# Altium PCB 夏友.PcbDoc (part 2 of 6)
Units mm, origin at the board's own origin, x right, y up, seen from the top; angles counter-clockwise.
Board outline 130.55 x 65.02 mm, 2 copper layers (Top Layer, Bottom Layer); 162 components, 175 nets, 628 pads, 694 vias.
Unrouted connection lines stored in the file: 1.
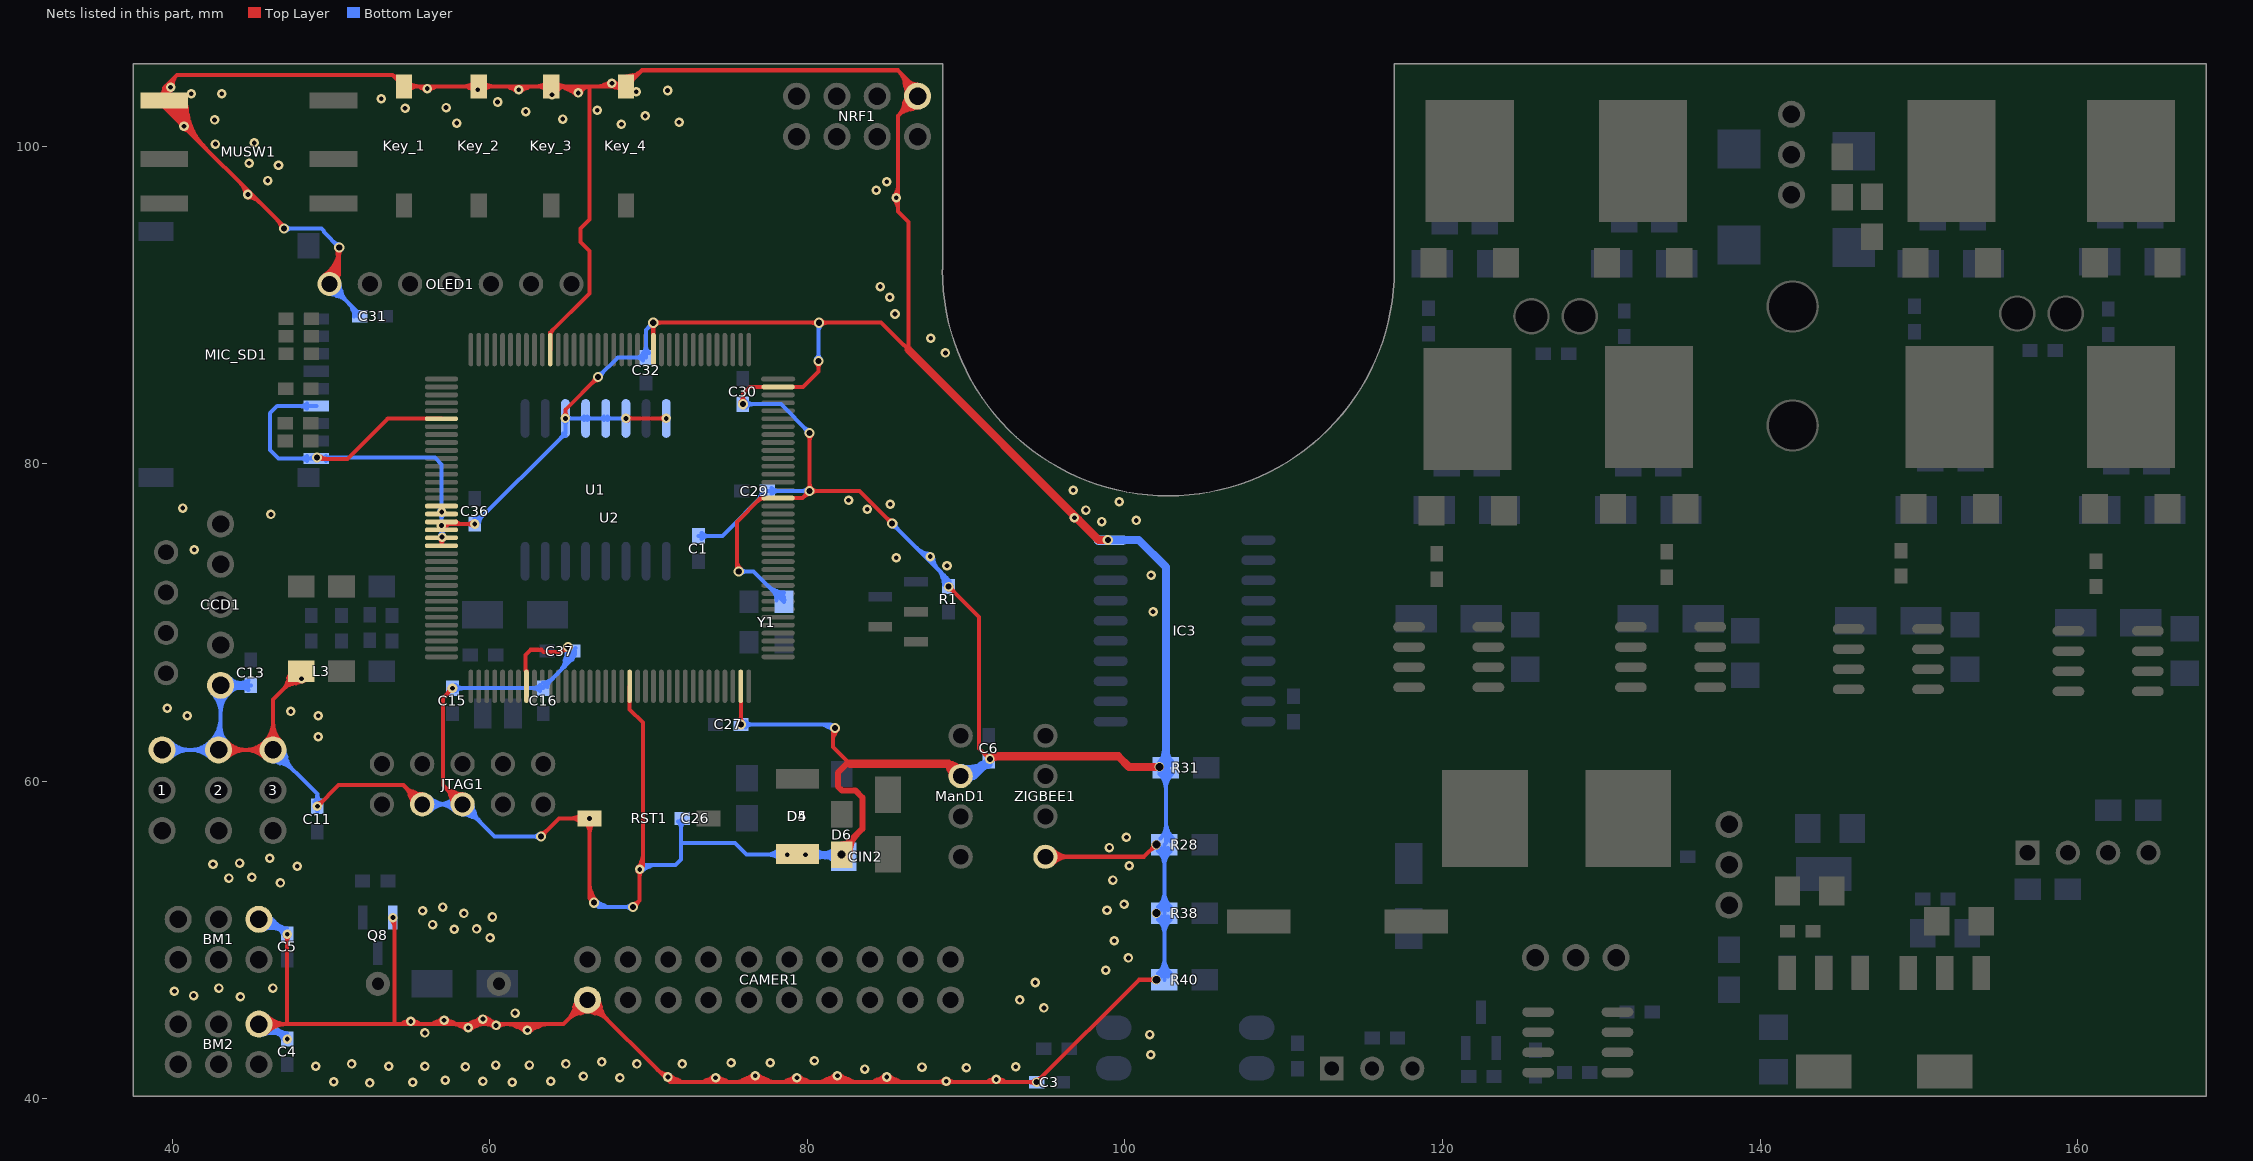
[diagram p2: the nets of this part, all layers, seen from the top]

## Via types
v1: diameter 0.6, hole 0.3, Top Layer to Bottom Layer, 442 vias
v2: diameter 0.635, hole 0.381, Top Layer to Bottom Layer, 150 vias
v3: diameter 0.6, hole 0.381, Top Layer to Bottom Layer, 48 vias
v4: diameter 0.7, hole 0.6, Top Layer to Bottom Layer, 16 vias
v5: diameter 0.6, hole 0.5, Top Layer to Bottom Layer, 10 vias
v6: diameter 0.6, hole 0.4, Top Layer to Bottom Layer, 7 vias
v7: diameter 0.7, hole 0.5, Top Layer to Bottom Layer, 5 vias
v8: diameter 0.6, hole 0.33, Top Layer to Bottom Layer, 5 vias
v9: diameter 0.7, hole 0.4, Top Layer to Bottom Layer, 3 vias
v10: diameter 1, hole 1, Top Layer to Bottom Layer, 2 vias
v11: diameter 3, hole 3, Top Layer to Bottom Layer, 2 vias
v12: diameter 1.016, hole 0.762, Top Layer to Bottom Layer, 2 vias
v13: diameter 0.7, hole 0.381, Top Layer to Bottom Layer, 1 vias
v14: diameter 0.635, hole 0.508, Top Layer to Bottom Layer, 1 vias

## Nets (pads, with @x,y where several pads share a name; then routed paths per layer and width w, separated by ;. In a path a pad name is that pad's centre, name@x,y a point inside that pad or via, vN(x,y) a via of type N, cw(c..) or ccw(c..) an arc to the next point about the centre after c; other vN are vias at no path point) (continued)
DGND: 1.1 2.1 3.1 BM1.1 BM2.1 C1.2 C3.1 C4.2 C5.2 C6.2 C11.1 C13.1 C15.2 C16.2 C26.1 C27.1 C29.1 C30.2 C31.2 C32.2 C36.1 C37.2 CAMER1.20 CCD1.5 CIN2.2 D4.1 D5.1 D6.2 IC3.10 JTAG1.3 JTAG1.5 Key_1.2 Key_2.2 Key_3.2 Key_4.2 L3.1 ManD1.2 MIC_SD1.6 MIC_SD1.9 MUSW1.4 NRF1.8 OLED1.1 Q8.3 R1.1 R28.1 R31.1 R38.1 R40.1 RST1.2 U1.3 U1.4 U1.5 U1.6 U1.8 U2.6 U2.17 U2.18 U2.19 U2.20 U2.21 U2.22 U2.44 U2.57 U2.71 U2.93 U2.107 U2.121 U2.134 Y1.1 ZIGBEE1.4 | length 1434.2
  Top Layer w0.254: MUSW1.4@39.403,103.231 ccw(c39.351,103.429) 39.548,103.376 ccw(c39.675,103.342) MUSW1.4@39.629,103.219 ; 39.617,103.557 cw(c39.709,103.451) v1@39.795,103.563 ; MUSW1.4@39.625,103.239 ccw(c39.376,103.525) v1@39.736,103.645 ; 39.764,102.258 cw(c40.306,102.403) MUSW1.4@39.82,102.684 ; MUSW1.4@40.283,102.565 cw(c39.535,101.5) 40.816,101.724 ; MUSW1.4@40.294,102.557 cw(c40.048,102.181) 40.488,102.274 ; MUSW1.4@40.426,102.774 cw(c39.506,101.531) 41.036,101.759 ; MUSW1.4@40.429,102.773 cw(c40.033,102.21) 40.711,102.328 ; 40.562,101.926 cw(c41.295,102.081) MUSW1.4@40.762,102.608 ; MUSW1.4@40.577,102.978 cw(c40.022,102.228) 40.945,102.366 ; 40.719,102.282 cw(c41.212,102.368) MUSW1.4@40.802,102.656 ; v1@40.918,101.293 ccw(c41.741,101.502) 41.347,100.749 ; 2.1@42.926,61.976 3.1@46.355,61.976 46.355,65.146 L3.1@48.138,66.929 ; BM2.1@45.466,44.704 47.225,44.704 ; v2@47.107,94.86 39.497,102.47 MUSW1.4@39.497,102.87 39.497,103.672 ; 47.195,66.051 cw(c48.341,65.743) L3.1@48.002,66.881 ; v1(47.244,50.368) 47.244,44.723 47.225,44.704 ; L3.1@47.312,66.49 cw(c48.189,66.255) L3.1@47.93,67.125 ; 47.4,66.076 ccw(c47.144,67.031) L3.1@48,66.536 ; 47.425,66.083 ccw(c47.151,67.106) L3.1@48.188,66.887 ; 47.502,66.138 cw(c47.983,65.461) L3.1@48.121,66.279 ; L3.1@47.659,66.283 ccw(c47.472,66.981) L3.1@48.191,66.909 ; L3.1@47.706,66.314 cw(c47.874,66.057) L3.1@48.051,66.308 ; L3.1@47.786,66.433 cw(c47.839,66.236) L3.1@48.008,66.352 ; 47.792,66.171 ccw(c47.608,66.493) L3.1@47.978,66.464 ; 47.825,66.19 ccw(c47.605,67.01) L3.1@48.436,66.834 ; L3.1@48.115,66.619 ccw(c48.014,67.113) L3.1@48.456,66.871 ; L3.1@48.225,66.297 ccw(c48.06,66.914) L3.1@48.685,66.781 ; v2(49.127,80.379) 49.206,80.3 51.05,80.3 53.581,82.831 U2.6@56.964,82.831 ; v1(49.149,58.42) 50.479,59.75 54.575,59.75 55.753,58.572 JTAG1.3@55.753,58.547 ; OLED1.1@49.911,91.313 50.525,91.927 ; OLED1.1@50.096,91.921 ccw(c50.168,92.159) 50.354,91.993 ccw(c50.479,91.881) OLED1.1@50.36,91.762 ; v1(53.909,51.417) 54,51.326 54,44.704 ; 54.537,44.786 cw(c54.696,44.512) v1@54.909,44.747 ; 54.954,59.16 ccw(c55.946,59.426) JTAG1.3@55.726,58.423 ; v1@55.141,44.747 cw(c55.354,44.512) 55.513,44.786 ; 55.163,59.34 cw(c54.908,58.386) JTAG1.3@55.878,58.571 ; 55.644,103.681 ccw(c55.761,103.883) v1@55.941,103.735 ; v1@56.209,103.735 ccw(c56.389,103.883) 56.506,103.681 ; 56.523,44.795 cw(c56.785,44.34) v1@57.041,44.799 ; 56.854,44.703 ccw(c56.751,44.883) v1@56.955,44.919 ; U2.22@56.964,74.831 U2.21@56.964,75.331 ; U2.19@57.039,76.2 v1(59.055,76.2) ; U2.19@57.114,76.187 ccw(c57.259,76.272) 57.343,76.126 ; v1@57.209,44.799 cw(c57.465,44.34) 57.727,44.795 ; v1@57.295,44.919 ccw(c57.499,44.883) 57.396,44.703 ; 57.499,59.141 ccw(c58.46,59.399) JTAG1.5@58.269,58.422 ; v1(57.658,65.862) 57.05,65.254 57.05,59.775 58.278,58.547 JTAG1.5@58.293,58.547 ; 57.684,59.345 cw(c57.421,58.361) JTAG1.5@58.417,58.574 ; 58.074,44.615 ccw(c58.31,45.025) v1@58.559,44.622 ; v1@58.579,44.514 cw(c59.247,44.147) 59.049,44.883 ; 58.704,103.672 ccw(c58.912,104.032) Key_2.2@59.151,103.692 ; v1@58.741,44.622 ccw(c58.99,45.025) 59.226,44.615 ; 58.858,44.804 cw(c59.25,44.125) v1@59.516,44.862 ; 59.19,44.712 ccw(c58.974,45.085) v1@59.403,45.042 ; Key_2.2@59.349,103.692 ccw(c59.588,104.032) Key_2.2@59.796,103.672 ; v1@59.543,45.1 cw(c59.665,44.814) 59.883,45.035 ; v1@59.634,44.862 cw(c59.9,44.125) v1@60.292,44.804 ; v1@59.643,44.866 cw(c59.825,44.437) v1@60.153,44.768 ; v1@59.747,45.042 ccw(c60.176,45.085) 59.96,44.712 ; 59.982,45.009 ccw(c60.352,45.225) v1@60.386,44.797 ; 60.034,44.836 cw(c59.823,44.467) v1@60.233,44.579 ; 60.043,44.831 ccw(c60.246,45.188) v1@60.354,44.792 ; 61.279,103.672 ccw(c61.487,104.032) v1@61.726,103.692 ; 61.58,44.591 ccw(c62.074,45.447) v1@62.33,44.492 ; 61.901,44.689 cw(c61.575,44.125) v1@62.207,44.283 ; v1@61.924,103.692 ccw(c62.163,104.032) 62.371,103.672 ; U2.44@62.314,65.981 62.314,66.988 62.241,67.061 ; v1@62.42,44.492 ccw(c62.676,45.447) 63.17,44.591 ; v1@62.543,44.283 cw(c63.175,44.125) 62.849,44.689 ; v2(63.225,56.525) 64.358,57.658 v1(66.294,57.658) 66.294,52.631 ; v2@63.23,56.715 ccw(c63.241,57.138) 63.543,56.843 ; v2@63.415,56.527 cw(c63.863,56.53) 63.55,56.85 ; v2@63.415,56.53 cw(c63.838,56.541) 63.543,56.843 ; U2.134@63.814,87.181 63.814,88.264 66.275,90.725 66.275,93.406 65.728,93.953 65.728,94.797 66.3,95.369 66.3,103.759 ; Key_3.2@63.932,103.398 ccw(c63.95,103.861) Key_3.2@64.351,103.629 ; 64.646,68.249 ccw(c64.617,68.723) v2@64.973,68.408 ; v1(64.77,82.85) 64.77,83.395 v2(66.825,85.45) ; 64.78,103.616 ccw(c65.274,104.472) v1@65.53,103.517 ; v2(64.925,68.45) 64.8,68.45 64.496,68.146 ; 65.089,103.721 cw(c64.746,103.128) v1@65.408,103.305 ; 65.216,45.378 cw(c66.406,45.059) CAMER1.20@66.159,46.266 ; 65.317,45.277 ccw(c64.998,46.467) CAMER1.20@66.205,46.22 ; 65.323,45.775 cw(c66.314,45.509) CAMER1.20@66.108,46.515 ; v1@65.608,103.52 ccw(c65.665,103.818) 65.934,103.678 ; 65.714,45.384 ccw(c65.448,46.375) CAMER1.20@66.454,46.169 ; CAMER1.20@65.88,46.169 ccw(c66.886,46.375) 66.62,45.384 ; CAMER1.20@66.129,46.22 ccw(c67.336,46.467) 67.017,45.277 ; CAMER1.20@66.175,46.266 cw(c65.928,45.059) 67.118,45.378 ; CAMER1.20@66.226,46.515 cw(c66.02,45.509) 67.011,45.775 ; 66.304,52.697 ccw(c66.575,52.854) v2@66.575,52.54 ; 66.366,52.589 cw(c66.149,52.464) v2@66.391,52.399 ; 66.395,53.029 cw(c65.867,52.724) v2@66.407,52.439 ; v2(66.575,52.35) 66.294,52.631 ; v2@66.635,85.445 cw(c66.212,85.434) 66.507,85.132 cw(c66.809,84.837) v2@66.82,85.26 ; v2@66.823,85.26 ccw(c66.82,84.812) 66.5,85.125 ; 67.182,103.844 cw(c67.365,103.525) v1@67.593,103.814 ; v1@67.807,103.814 cw(c68.035,103.525) Key_4.2@68.218,103.844 ; Key_4.2@68.468,104.073 cw(c69.176,103.695) Key_4.2@69.01,104.48 ; v1(68.58,82.85) v1(71.12,82.85) ; U2.57@68.814,65.981 68.814,64.53 69.65,63.694 69.65,54.653 v1(69.447,54.45) 69.447,52.497 v2(69.025,52.075) ; v2@69.03,52.265 ccw(c69.041,52.688) 69.343,52.393 ; v2@69.215,52.077 cw(c69.663,52.08) 69.35,52.4 cw(c69.03,52.713) v2@69.027,52.265 ; v2@69.215,52.08 cw(c69.638,52.091) 69.343,52.393 ; 69.564,54.987 ccw(c69.91,54.787) v1@69.587,54.552 ; U2.121@70.314,87.181 70.3,87.195 v2(70.3,88.875) v2(80.75,88.875) 84.65,88.875 86.062,87.462 86.087,87.462 86.362,87.187 86.362,93.271 86.379,93.288 86.379,94.762 86.362,94.779 86.362,95.213 85.7,95.875 85.7,101.895 NRF1.8@86.945,103.14 86.945,103.53 85.7,104.775 ; v1@71.283,41.212 cw(c71.549,40.458) 71.948,41.15 ; v1@71.397,41.394 ccw(c71.839,41.444) 71.617,41.059 ; 73.578,41.144 cw(c73.888,40.608) v1@74.151,41.168 ; 73.91,41.053 ccw(c73.767,41.3) v1@74.052,41.316 ; v1@74.299,41.168 cw(c74.562,40.608) 74.872,41.144 ; v1@74.398,41.316 ccw(c74.683,41.3) 74.54,41.053 ; v2(75.685,73.215) 75.578,73.322 75.578,76.34 77.069,77.831 U2.93@78.164,77.831 79.706,77.831 v2(80.15,78.275) ; U2.71@75.814,65.981 75.814,63.586 v2(75.825,63.575) ; 75.93,41.184 cw(c76.424,40.328) v1@76.68,41.283 ; v2(75.946,83.744) 75.946,84.396 76.381,84.831 U2.107@78.164,84.831 79.731,84.831 80.7,85.8 v2(80.7,86.475) ; 76.239,41.079 ccw(c75.896,41.672) v1@76.558,41.495 ; v1@76.77,41.283 cw(c77.026,40.328) 77.52,41.184 ; v1@76.892,41.495 ccw(c77.554,41.672) 77.211,41.079 ; 78.703,41.144 cw(c79.013,40.608) v1@79.276,41.168 ; 79.035,41.053 ccw(c78.892,41.3) v1@79.177,41.316 ; v1@79.424,41.168 cw(c79.687,40.608) 79.997,41.144 ; v1@79.523,41.316 ccw(c79.808,41.3) 79.665,41.053 ; v2@79.96,78.27 cw(c79.537,78.259) 79.832,77.957 cw(c80.134,77.662) v2@80.145,78.085 ; v2@79.96,78.273 cw(c79.512,78.27) 79.825,77.95 ; v2@80.148,78.085 ccw(c80.145,77.637) 79.825,77.95 ; v2(80.15,81.925) v2(80.15,78.275) ; 81.105,41.184 cw(c81.599,40.328) v1@81.855,41.283 ; 81.414,41.079 ccw(c81.071,41.672) v1@81.733,41.495 ; v2@81.642,63.199 cw(c81.507,63.014) 81.705,62.9 ; v2(81.754,63.353) 81.621,63.22 81.621,62.16 82.681,61.1 ; v1@81.945,41.283 cw(c82.201,40.328) 82.695,41.184 ; v1@82.067,41.495 ccw(c82.729,41.672) 82.386,41.079 ; 84.277,41.15 cw(c84.676,40.458) v1@84.942,41.212 ; 84.608,41.059 ccw(c84.386,41.444) v1@84.828,41.394 ; v1@85.058,41.212 cw(c85.324,40.458) 85.723,41.15 ; v2@85.16,76.23 ccw(c84.737,76.241) 85.032,76.543 ccw(c85.334,76.838) v2@85.345,76.415 ; v1@85.172,41.394 ccw(c85.614,41.444) 85.392,41.059 ; v2@85.348,76.415 cw(c85.345,76.863) 85.025,76.55 ; v2(85.35,76.225) 83.3,78.275 v2(80.15,78.275) ; 85.626,96.371 cw(c85.772,96.455) v1@85.687,96.6 ; 85.626,97.129 ccw(c85.772,97.045) v1@85.687,96.9 ; 85.994,102.29 cw(c87.184,101.971) NRF1.8@86.937,103.178 ; 86.095,102.189 ccw(c85.776,103.379) NRF1.8@86.983,103.132 ; 86.101,102.687 cw(c87.092,102.421) NRF1.8@86.886,103.427 ; 86.121,104.016 ccw(c87.783,104.242) NRF1.8@86.768,102.907 ; 86.377,103.953 ccw(c87.553,104.113) NRF1.8@86.924,103.107 ; 86.492,102.296 ccw(c86.226,103.287) NRF1.8@87.232,103.081 ; 86.626,103.948 cw(c86.413,103.151) NRF1.8@87.238,103.134 ; v3(88.9,72.263) 90.825,70.338 90.825,62.075 v3(91.5,61.4) ; 91.406,41.133 cw(c91.57,40.85) v1@91.786,41.095 ; v1@92.014,41.095 cw(c92.23,40.85) 92.394,41.133 ; ZIGBEE1.4@94.996,55.245 101.219,55.245 v5(101.981,56.007) ; v5(101.981,47.498) 100.898,47.498 v3(94.45,41.05) 71.345,41.05 CAMER1.20@66.167,46.228 64.643,44.704 47.225,44.704 ; 39.497,103.672 cw(c38.821,103.672) 39.257,103.155 ccw(c38.821,103.672) 39.497,103.672 ; 39.497,103.672 ccw(c40.173,103.672) 39.737,103.155 cw(c40.173,103.672) 39.497,103.672 ; 39.497,103.672 40.3,104.475 ; 40.3,104.475 ccw(c40.89,103.885) 40.07,103.732 cw(c40.89,103.885) 40.3,104.475 ; 40.3,104.475 53.894,104.475 ; 40.538,101.638 cw(c40.146,101.412) v1@40.583,101.295 ; 40.538,101.638 cw(c40.146,101.412) v1@40.583,101.295 ; 40.538,101.638 cw(c40.146,101.412) v1@40.583,101.295 ; 40.562,101.596 ccw(c40.894,101.787) v1@40.795,101.417 ; 40.562,101.596 ccw(c40.894,101.787) v1@40.795,101.417 ; 40.562,101.596 ccw(c40.894,101.787) v1@40.795,101.417 ; v1@40.591,101.318 ccw(c39.975,101.583) 40.598,101.831 ; v1@40.591,101.318 ccw(c39.975,101.583) 40.598,101.831 ; v1@40.591,101.318 ccw(c39.975,101.583) 40.598,101.831 ; v1@40.621,101.366 ccw(c40.149,101.791) 40.757,101.976 ; v1@40.621,101.366 ccw(c40.149,101.791) 40.757,101.976 ; v1@40.621,101.366 ccw(c40.149,101.791) 40.757,101.976 ; v1@40.712,101.081 cw(c40.458,99.948) 41.439,100.57 ; v1@40.712,101.081 cw(c40.458,99.948) 41.439,100.57 ; v1@40.712,101.081 cw(c40.458,99.948) 41.439,100.57 ; v1@40.731,101.078 cw(c40.662,100.464) 41.145,100.85 ; v1@40.731,101.078 cw(c40.662,100.464) 41.145,100.85 ; v1@40.731,101.078 cw(c40.662,100.464) 41.145,100.85 ; v1@40.768,101.329 cw(c40.648,100.794) 41.111,101.088 ; v1@40.768,101.329 cw(c40.648,100.794) 41.111,101.088 ; v1@40.768,101.329 cw(c40.648,100.794) 41.111,101.088 ; v1@40.81,101.196 ccw(c40.54,101.439) 40.888,101.545 ; v1@40.81,101.196 ccw(c40.54,101.439) 40.888,101.545 ; v1@40.81,101.196 ccw(c40.54,101.439) 40.888,101.545 ; 44.058,61.976 cw(c44.058,63.108) 43.258,62.308 ccw(c44.058,63.108) 44.058,61.976 ; 44.058,61.976 ccw(c44.058,60.844) 43.258,61.644 cw(c44.058,60.844) 44.058,61.976 ; 44.61,61.976 cw(c44.61,60.231) 45.844,61.465 ccw(c44.61,60.231) 44.61,61.976 ; 44.61,61.976 ccw(c44.61,63.721) 3.1@45.844,62.487 ; 44.61,61.976 ccw(c44.61,63.721) 3.1@45.844,62.487 ; 44.671,61.976 cw(c44.671,63.721) 43.437,62.487 ccw(c44.671,63.721) 44.671,61.976 ; 44.671,61.976 ccw(c44.671,60.231) 43.437,61.465 cw(c44.671,60.231) 44.671,61.976 ; 45.223,61.976 cw(c45.223,60.844) 46.023,61.644 ccw(c45.223,60.844) 45.223,61.976 ; 45.223,61.976 ccw(c45.223,63.108) 3.1@46.023,62.308 ; 45.223,61.976 ccw(c45.223,63.108) 3.1@46.023,62.308 ; 3.1@45.844,62.487 ccw(c44.61,63.721) 46.355,63.721 ; 3.1@45.844,62.487 ccw(c44.61,63.721) 46.355,63.721 ; 3.1@46.023,62.308 ccw(c45.223,63.108) 46.355,63.108 ; 3.1@46.023,62.308 ccw(c45.223,63.108) 46.355,63.108 ; 46.355,63.108 ccw(c47.487,63.108) 46.687,62.308 cw(c47.487,63.108) 46.355,63.108 ; 46.355,63.721 ccw(c48.1,63.721) 46.866,62.487 cw(c48.1,63.721) 46.355,63.721 ; 46.598,44.704 cw(c46.598,45.836) 45.798,45.036 ccw(c46.598,45.836) 46.598,44.704 ; 46.598,44.704 ccw(c46.598,43.572) 45.798,44.372 cw(c46.598,43.572) 46.598,44.704 ; 47.211,44.704 cw(c47.211,46.449) 45.977,45.215 ccw(c47.211,46.449) 47.211,44.704 ; 47.211,44.704 ccw(c47.211,42.959) 45.977,44.193 cw(c47.211,42.959) 47.211,44.704 ; 47.244,49.951 cw(c47.662,49.951) 47.366,50.246 ccw(c47.662,49.951) 47.244,49.951 ; 47.244,49.951 ccw(c46.826,49.951) 47.122,50.246 cw(c46.826,49.951) 47.244,49.951 ; L3.1@47.675,66.287 ccw(c47.537,66.804) L3.1@48,66.536 ; L3.1@47.675,66.287 ccw(c47.537,66.804) L3.1@48,66.536 ; L3.1@47.675,66.287 ccw(c47.537,66.804) L3.1@48,66.536 ; L3.1@47.836,66.33 cw(c47.913,66.04) L3.1@48.064,66.3 ; L3.1@47.836,66.33 cw(c47.913,66.04) L3.1@48.064,66.3 ; L3.1@47.836,66.33 cw(c47.913,66.04) L3.1@48.064,66.3 ; 49.444,58.715 cw(c49.149,59.011) 49.149,58.593 ccw(c49.149,59.011) 49.444,58.715 ; 49.444,58.715 ccw(c49.74,58.42) 49.322,58.42 cw(c49.74,58.42) 49.444,58.715 ; v2@50.361,93.529 cw(c49.963,93.297) 50.408,93.18 ; v2@50.361,93.529 cw(c49.963,93.297) 50.408,93.18 ; v2@50.361,93.529 cw(c49.963,93.297) 50.408,93.18 ; 50.408,93.18 cw(c50.853,93.064) v2@50.621,93.461 ; 50.408,93.18 cw(c50.853,93.064) v2@50.621,93.461 ; 50.408,93.18 cw(c50.853,93.064) v2@50.621,93.461 ; 50.525,91.927 cw(c50.33,92.122) 50.203,91.877 ccw(c50.33,92.122) 50.525,91.927 ; 50.525,91.927 ccw(c50.72,91.732) 50.475,91.605 cw(c50.72,91.732) 50.525,91.927 ; 50.525,91.927 v2(50.525,93.625) ; 50.525,93.165 cw(c50.985,93.165) 50.66,93.49 ccw(c50.985,93.165) 50.525,93.165 ; 50.525,93.165 ccw(c50.065,93.165) 50.39,93.49 cw(c50.065,93.165) 50.525,93.165 ; v2(50.525,93.625) cw(c48.396,93.625) 49.563,91.844 ccw(c48.396,93.625) v2(50.525,93.625) ; 53.894,104.475 ccw(c54.26,104.841) 54.462,104.364 cw(c54.26,104.841) 53.894,104.475 ; 53.894,104.475 Key_1.2@54.61,103.759 Key_2.2@59.309,103.759 Key_3.2@63.881,103.759 66.3,103.759 ; 55.53,103.759 cw(c55.53,104.679) 54.879,104.028 ccw(c55.53,104.679) 55.53,103.759 ; 55.53,103.759 ccw(c55.53,102.839) 54.879,103.49 cw(c55.53,102.839) 55.53,103.759 ; 57.363,65.567 cw(c57.658,65.272) 57.658,65.689 ccw(c57.658,65.272) 57.363,65.567 ; 57.363,65.567 ccw(c57.067,65.862) 57.485,65.862 cw(c57.067,65.862) 57.363,65.567 ; 58.389,103.759 cw(c58.389,102.839) 59.04,103.49 ccw(c58.389,102.839) 58.389,103.759 ; 58.389,103.759 ccw(c58.389,104.679) 59.04,104.028 cw(c58.389,104.679) 58.389,103.759 ; 58.637,76.2 cw(c58.637,75.782) 58.933,76.078 ccw(c58.637,75.782) 58.637,76.2 ; 58.637,76.2 ccw(c58.637,76.618) 58.933,76.322 cw(c58.637,76.618) 58.637,76.2 ; 58.706,103.682 ccw(c58.92,104.054) Key_2.2@59.155,103.695 ; 58.706,103.682 ccw(c58.92,104.054) Key_2.2@59.155,103.695 ; 58.706,103.682 ccw(c58.92,104.054) Key_2.2@59.155,103.695 ; v1@59.868,45.05 cw(c59.482,44.374) v1@60.233,44.579 ; v1@59.868,45.05 cw(c59.482,44.374) v1@60.233,44.579 ; v1@59.868,45.05 cw(c59.482,44.374) v1@60.233,44.579 ; 59.97,44.753 cw(c59.851,44.308) v1@60.25,44.539 ; 59.97,44.753 cw(c59.851,44.308) v1@60.25,44.539 ; 59.97,44.753 cw(c59.851,44.308) v1@60.25,44.539 ; 60.03,44.737 ccw(c60.126,45.099) v1@60.314,44.775 ; 60.03,44.737 ccw(c60.126,45.099) v1@60.314,44.775 ; 60.03,44.737 ccw(c60.126,45.099) v1@60.314,44.775 ; 60.229,103.759 cw(c60.229,104.679) 59.578,104.028 ccw(c60.229,104.679) 60.229,103.759 ; 60.229,103.759 ccw(c60.229,102.839) 59.578,103.49 cw(c60.229,102.839) 60.229,103.759 ; 62.241,67.061 cw(c62.108,66.928) 62.292,66.886 ccw(c62.108,66.928) 62.241,67.061 ; 62.241,67.061 ccw(c62.435,67.061) 62.327,66.9 cw(c62.435,67.061) 62.241,67.061 ; 62.241,67.061 62.241,67.962 62.559,68.281 63.25,68.281 63.385,68.146 64.496,68.146 ; 62.961,103.759 cw(c62.961,102.839) 63.612,103.49 ccw(c62.961,102.839) 62.961,103.759 ; 62.961,103.759 ccw(c62.961,104.679) 63.612,104.028 cw(c62.961,104.679) 62.961,103.759 ; v2@63.227,56.715 ccw(c63.232,57.157) 63.541,56.841 ; v2@63.227,56.715 ccw(c63.232,57.157) 63.541,56.841 ; v2@63.227,56.715 ccw(c63.23,57.163) 63.55,56.85 ; 63.541,56.841 ccw(c63.857,56.532) 63.415,56.527 cw(c63.857,56.532) 63.541,56.841 ; 63.55,56.85 cw(c63.225,57.175) 63.225,56.715 ccw(c63.225,57.175) 63.55,56.85 ; 63.55,56.85 ccw(c63.875,56.525) 63.415,56.525 cw(c63.875,56.525) 63.55,56.85 ; Key_3.2@64.092,103.18 cw(c64.88,102.969) 64.472,103.675 ; Key_3.2@64.092,103.18 cw(c64.88,102.969) 64.472,103.675 ; Key_3.2@64.092,103.18 cw(c64.88,102.969) 64.472,103.675 ; Key_3.2@64.094,103.262 cw(c64.329,103.315) Key_3.2@64.209,103.523 ; Key_3.2@64.094,103.262 cw(c64.329,103.315) Key_3.2@64.209,103.523 ; Key_3.2@64.094,103.262 cw(c64.329,103.315) Key_3.2@64.209,103.523 ; 64.496,68.146 cw(c64.801,67.84) 64.887,68.263 ccw(c64.801,67.84) 64.496,68.146 ; 64.77,83.268 cw(c64.352,83.268) 64.648,82.972 ccw(c64.352,83.268) 64.77,83.268 ; 64.77,83.268 ccw(c65.188,83.268) 64.892,82.972 cw(c65.188,83.268) 64.77,83.268 ; 64.801,103.759 cw(c64.801,104.679) 64.15,104.028 ccw(c64.801,104.679) 64.801,103.759 ; 64.801,103.759 ccw(c64.801,102.839) 64.15,103.49 cw(c64.801,102.839) 64.801,103.759 ; 64.933,44.994 cw(c66.167,43.76) CAMER1.20@66.167,45.505 ; 64.933,44.994 ccw(c63.699,46.228) 65.444,46.228 cw(c63.699,46.228) 64.933,44.994 ; 64.933,44.994 cw(c66.167,43.76) CAMER1.20@66.167,45.505 ; 65.12,57.658 cw(c65.12,56.738) 65.771,57.389 ccw(c65.12,56.738) 65.12,57.658 ; 65.12,57.658 ccw(c65.12,58.578) 65.771,57.927 cw(c65.12,58.578) 65.12,57.658 ; 65.366,45.427 cw(c66.167,44.627) CAMER1.20@66.167,45.759 ; 65.366,45.427 ccw(c64.566,46.228) 65.698,46.228 cw(c64.566,46.228) 65.366,45.427 ; 65.366,45.427 cw(c66.167,44.627) CAMER1.20@66.167,45.759 ; RST1.2@65.876,57.658 cw(c65.876,57.24) RST1.2@66.172,57.536 ; RST1.2@65.876,57.658 ccw(c65.876,58.076) 66.172,57.78 cw(c65.876,58.076) RST1.2@65.876,57.658 ; RST1.2@65.876,57.658 cw(c65.876,57.24) RST1.2@66.172,57.536 ; CAMER1.20@66.167,45.505 cw(c66.167,43.76) 67.401,44.994 ; CAMER1.20@66.167,45.505 cw(c66.167,43.76) 67.401,44.994 ; CAMER1.20@66.167,45.759 cw(c66.167,44.627) 66.968,45.427 ; CAMER1.20@66.167,45.759 cw(c66.167,44.627) 66.968,45.427 ; RST1.2@66.172,57.536 cw(c65.876,57.24) RST1.2@66.294,57.24 ; RST1.2@66.172,57.536 cw(c65.876,57.24) RST1.2@66.294,57.24 ; 66.294,52.631 cw(c66.068,52.405) 66.386,52.371 ccw(c66.068,52.405) 66.294,52.631 ; 66.294,52.631 ccw(c66.52,52.857) 66.554,52.539 cw(c66.52,52.857) 66.294,52.631 ; 66.294,56.738 cw(c67.214,56.738) 66.563,57.389 ccw(c67.214,56.738) 66.294,56.738 ; 66.294,56.738 ccw(c65.374,56.738) 66.025,57.389 cw(c65.374,56.738) 66.294,56.738 ; RST1.2@66.294,57.24 cw(c66.712,57.24) 66.416,57.536 ccw(c66.712,57.24) RST1.2@66.294,57.24 ; 66.3,103.759 ccw(c66.3,103.189) 65.744,103.313 cw(c66.3,103.189) 66.3,103.759 ; 66.3,103.759 Key_4.2@68.58,103.759 69.596,104.775 ; 66.5,85.125 cw(c66.825,84.8) 66.825,85.259 ccw(c66.825,84.8) 66.5,85.125 ; 66.5,85.125 ccw(c66.175,85.45) 66.634,85.45 cw(c66.175,85.45) 66.5,85.125 ; 66.5,85.125 ccw(c66.187,85.445) v2@66.635,85.448 ; 66.509,85.134 cw(c66.818,84.818) 66.823,85.26 ccw(c66.818,84.818) 66.509,85.134 ; 66.509,85.134 ccw(c66.193,85.443) v2@66.635,85.448 ; 66.509,85.134 ccw(c66.193,85.443) v2@66.635,85.448 ; 66.968,45.427 cw(c67.768,46.228) 66.636,46.228 ccw(c67.768,46.228) 66.968,45.427 ; 67.401,44.994 cw(c68.635,46.228) 66.89,46.228 ccw(c68.635,46.228) 67.401,44.994 ; v1@67.628,103.913 ccw(c68.006,104.105) 67.896,103.696 ; v1@67.628,103.913 ccw(c68.006,104.105) 67.896,103.696 ; v1@67.628,103.913 ccw(c68.006,104.105) 67.896,103.696 ; v1@67.66,103.759 cw(c67.66,102.839) 68.311,103.49 ccw(c67.66,102.839) v1@67.66,103.759 ; v1@67.66,103.759 ccw(c67.66,104.679) 68.311,104.028 cw(c67.66,104.679) v1@67.66,103.759 ; 68.998,82.85 cw(c68.998,83.268) 68.702,82.972 ccw(c68.998,83.268) 68.998,82.85 ; 68.998,82.85 ccw(c68.998,82.432) 68.702,82.728 cw(c68.998,82.432) 68.998,82.85 ; v2@69.027,52.265 ccw(c69.032,52.707) 69.341,52.391 ; v2@69.027,52.265 ccw(c69.032,52.707) 69.341,52.391 ; 69.341,52.391 ccw(c69.657,52.082) 69.215,52.077 cw(c69.657,52.082) 69.341,52.391 ; 69.35,52.4 cw(c69.025,52.725) 69.025,52.266 ccw(c69.025,52.725) 69.35,52.4 ; 69.35,52.4 ccw(c69.675,52.075) 69.216,52.075 cw(c69.675,52.075) 69.35,52.4 ; 69.447,54.032 cw(c69.865,54.032) 69.569,54.328 ccw(c69.865,54.032) 69.447,54.032 ; 69.447,54.032 ccw(c69.029,54.032) 69.325,54.328 cw(c69.029,54.032) 69.447,54.032 ; 69.596,104.775 cw(c68.67,105.701) 68.6,104.393 ccw(c68.67,105.701) 69.596,104.775 ; 69.596,104.775 85.7,104.775 ; 70.3,88.415 cw(c70.76,88.415) v2@70.435,88.74 ; 70.3,88.415 ccw(c69.84,88.415) 70.165,88.74 cw(c69.84,88.415) 70.3,88.415 ; 70.3,88.415 cw(c70.76,88.415) v2@70.435,88.74 ; v2@70.435,88.74 cw(c70.76,88.415) 70.76,88.875 ; v2@70.435,88.74 cw(c70.76,88.415) 70.76,88.875 ; 70.702,82.85 cw(c70.702,82.432) 70.998,82.728 ccw(c70.702,82.432) 70.702,82.85 ; 70.702,82.85 ccw(c70.702,83.268) 70.998,82.972 cw(c70.702,83.268) 70.702,82.85 ; 70.76,88.875 cw(c70.76,89.335) 70.435,89.01 ccw(c70.76,89.335) 70.76,88.875 ; 75.946,84.204 cw(c75.486,84.204) 75.811,83.879 ccw(c75.486,84.204) 75.946,84.204 ; 75.946,84.204 ccw(c76.406,84.204) 76.081,83.879 cw(c76.406,84.204) 75.946,84.204 ; 79.825,77.95 cw(c80.15,77.625) 80.15,78.084 ccw(c80.15,77.625) 79.825,77.95 ; 79.825,77.95 ccw(c79.5,78.275) 79.959,78.275 cw(c79.5,78.275) 79.825,77.95 ; 80.15,78.735 cw(c79.69,78.735) 80.015,78.41 ccw(c79.69,78.735) 80.15,78.735 ; 80.15,78.735 ccw(c80.61,78.735) v2@80.285,78.41 ; 80.15,78.735 ccw(c80.61,78.735) v2@80.285,78.41 ; 80.15,81.465 cw(c80.61,81.465) 80.285,81.79 ccw(c80.61,81.465) 80.15,81.465 ; 80.15,81.465 ccw(c79.69,81.465) 80.015,81.79 cw(c79.69,81.465) 80.15,81.465 ; v2@80.285,78.41 ccw(c80.61,78.735) 80.61,78.275 ; v2@80.285,78.41 ccw(c80.61,78.735) 80.61,78.275 ; 80.29,88.875 cw(c80.29,88.415) 80.615,88.74 ccw(c80.29,88.415) 80.29,88.875 ; 80.29,88.875 ccw(c80.29,89.335) 80.615,89.01 cw(c80.29,89.335) 80.29,88.875 ; 80.61,78.275 ccw(c80.61,77.815) 80.285,78.14 cw(c80.61,77.815) 80.61,78.275 ; 80.7,86.015 cw(c81.16,86.015) 80.835,86.34 ccw(c81.16,86.015) 80.7,86.015 ; 80.7,86.015 ccw(c80.24,86.015) 80.565,86.34 cw(c80.24,86.015) 80.7,86.015 ; 81.21,88.875 cw(c81.21,89.335) 80.885,89.01 ccw(c81.21,89.335) 81.21,88.875 ; 81.21,88.875 ccw(c81.21,88.415) 80.885,88.74 cw(c81.21,88.415) 81.21,88.875 ; 85.025,76.55 cw(c84.7,76.225) 85.159,76.225 ccw(c84.7,76.225) 85.025,76.55 ; 85.025,76.55 ccw(c85.35,76.875) 85.35,76.416 cw(c85.35,76.875) 85.025,76.55 ; 85.025,76.55 cw(c84.712,76.23) v2@85.16,76.227 ; v2@85.16,76.227 ccw(c84.718,76.232) 85.034,76.541 cw(c84.718,76.232) v2@85.16,76.227 ; 85.7,104.775 cw(c84.39,103.465) 86.228,103.231 ccw(c84.39,103.465) 85.7,104.775 ; 85.711,101.906 cw(c86.945,100.672) 86.945,102.417 ccw(c86.945,100.672) 85.711,101.906 ; 85.711,101.906 ccw(c84.477,103.14) 86.222,103.14 cw(c84.477,103.14) 85.711,101.906 ; 86.144,102.339 cw(c86.945,101.539) 86.945,102.671 ccw(c86.945,101.539) 86.144,102.339 ; 86.144,102.339 ccw(c85.344,103.14) 86.476,103.14 cw(c85.344,103.14) 86.144,102.339 ; 89.195,71.968 cw(c89.491,72.263) 89.073,72.263 ccw(c89.491,72.263) 89.195,71.968 ; 89.195,71.968 ccw(c88.9,71.672) 88.9,72.09 cw(c88.9,71.672) 89.195,71.968 ; 91.205,61.695 cw(c90.909,61.4) 91.327,61.4 ccw(c90.909,61.4) 91.205,61.695 ; 91.205,61.695 ccw(c91.5,61.991) 91.5,61.573 cw(c91.5,61.991) 91.205,61.695 ; 94.032,41.05 cw(c94.032,40.632) 94.328,40.928 ccw(c94.032,40.632) 94.032,41.05 ; 94.032,41.05 ccw(c94.032,41.468) 94.328,41.172 cw(c94.032,41.468) 94.032,41.05 ; 94.745,41.345 cw(c94.45,41.641) 94.45,41.223 ccw(c94.45,41.641) 94.745,41.345 ; 94.745,41.345 ccw(c95.041,41.05) 94.623,41.05 cw(c95.041,41.05) 94.745,41.345 ; 95.916,55.245 cw(c95.916,56.165) 95.265,55.514 ccw(c95.916,56.165) 95.916,55.245 ; 95.916,55.245 ccw(c95.916,54.325) 95.265,54.976 cw(c95.916,54.325) 95.916,55.245 ; 96.529,55.245 cw(c96.529,56.778) 95.445,55.694 ccw(c96.529,56.778) 96.529,55.245 ; 96.529,55.245 ccw(c96.529,53.712) 95.445,54.796 cw(c96.529,53.712) 96.529,55.245 ; 101.563,47.498 cw(c101.563,47.08) 101.859,47.376 ccw(c101.563,47.08) 101.563,47.498 ; 101.563,47.498 ccw(c101.563,47.916) 101.859,47.62 cw(c101.563,47.916) 101.563,47.498 ; 101.686,55.712 cw(c101.981,55.416) 101.981,55.834 ccw(c101.981,55.416) 101.686,55.712 ; 101.686,55.712 ccw(c101.39,56.007) 101.808,56.007 cw(c101.39,56.007) 101.686,55.712 ; MUSW1.4@39.346,102.87 ccw(c39.947,102.87) 39.522,102.445 cw(c39.947,102.87) MUSW1.4@39.346,102.87 ; MUSW1.4@39.497,102.777 cw(c40.351,102.777) 39.976,103.545 ccw(c40.351,102.777) MUSW1.4@39.497,102.777 ; MUSW1.4@39.497,103.184 cw(c40.152,103.184) 39.864,103.773 ccw(c40.152,103.184) MUSW1.4@39.497,103.184 ; 39.571,103.638 cw(c39.742,103.67) 39.619,103.794 ccw(c39.742,103.67) 39.571,103.638 ; MUSW1.4@39.6,102.87 ccw(c40.814,102.87) 39.956,102.011 cw(c40.814,102.87) MUSW1.4@39.6,102.87 ; v1@39.82,103.685 cw(c40.316,103.778) 39.959,104.134 ccw(c40.316,103.778) v1@39.82,103.685 ; MUSW1.4@39.854,102.87 ccw(c41.682,102.87) 40.389,101.578 cw(c41.682,102.87) MUSW1.4@39.854,102.87 ; MUSW1.4@40.108,102.87 ccw(c42.549,102.87) 40.823,101.144 cw(c42.549,102.87) MUSW1.4@40.108,102.87 ; MUSW1.4@40.362,102.87 ccw(c43.416,102.87) 41.256,100.711 cw(c43.416,102.87) MUSW1.4@40.362,102.87 ; 40.398,101.569 ccw(c40.75,101.92) 40.75,101.423 cw(c40.75,101.92) 40.398,101.569 ; 40.478,101.489 cw(c40.239,101.25) 40.577,101.25 ccw(c40.239,101.25) 40.478,101.489 ; MUSW1.4@40.616,102.87 ccw(c44.283,102.87) 41.69,100.277 cw(c44.283,102.87) MUSW1.4@40.616,102.87 ; v1@40.75,101.077 cw(c40.75,100.739) 40.989,100.978 ccw(c40.75,100.739) v1@40.75,101.077 ; MUSW1.4@40.87,102.87 ccw(c45.15,102.87) 42.124,99.843 cw(c45.15,102.87) MUSW1.4@40.87,102.87 ; v1@40.923,101.25 ccw(c41.42,101.25) 41.069,100.898 cw(c41.42,101.25) v1@40.923,101.25 ; 44.309,97.658 cw(c43.6,96.95) 44.602,96.95 ccw(c43.6,96.95) 44.309,97.658 ; v1@44.775,96.777 cw(c44.775,95.775) 45.483,96.484 ccw(c44.775,95.775) v1@44.775,96.777 ; 46.649,95.318 cw(c46.136,94.805) 46.862,94.805 ccw(c46.136,94.805) 46.649,95.318 ; 46.929,65.72 ccw(c45.721,66.929) 47.43,66.929 cw(c45.721,66.929) 46.929,65.72 ; 47.016,65.807 cw(c48.15,64.674) 48.15,66.277 ccw(c48.15,64.674) 47.016,65.807 ; 47.292,66.083 cw(c47.988,65.386) 47.988,66.371 ccw(c47.988,65.386) 47.292,66.083 ; 47.363,66.154 ccw(c46.588,66.929) 47.684,66.929 cw(c46.588,66.929) 47.363,66.154 ; 47.45,66.241 cw(c48.15,65.541) 48.15,66.531 ccw(c48.15,65.541) 47.45,66.241 ; v2@49.262,80.514 ccw(c49.778,81.029) 49.778,80.3 cw(c49.778,81.029) v2@49.262,80.514 ; OLED1.1@49.702,91.632 ccw(c48.704,93.155) 50.525,93.155 cw(c48.704,93.155) OLED1.1@49.702,91.632 ; OLED1.1@49.841,91.419 ccw(c49.012,92.685) 50.525,92.685 cw(c49.012,92.685) OLED1.1@49.841,91.419 ; OLED1.1@49.981,91.207 ccw(c49.32,92.214) 50.525,92.214 cw(c49.32,92.214) OLED1.1@49.981,91.207 ; v1@53.787,51.295 cw(c53.271,50.779) 54,50.779 ccw(c53.271,50.779) v1@53.787,51.295 ; Key_1.2@54.139,104.23 cw(c53.922,104.013) 54.229,104.013 ccw(c53.922,104.013) Key_1.2@54.139,104.23 ; 54.195,44.704 ccw(c54.195,45.705) 54.903,44.997 cw(c54.195,45.705) 54.195,44.704 ; 54.651,59.674 cw(c53.525,58.547) 55.118,58.547 ccw(c53.525,58.547) 54.651,59.674 ; 54.712,59.613 ccw(c55.753,60.655) 55.753,59.182 cw(c55.753,60.655) 54.712,59.613 ; 55.085,59.24 cw(c54.392,58.547) 55.372,58.547 ccw(c54.392,58.547) 55.085,59.24 ; 55.145,59.18 ccw(c55.753,59.787) 55.753,58.928 cw(c55.753,59.787) 55.145,59.18 ; v1@55.147,44.997 ccw(c55.855,45.705) 55.855,44.704 cw(c55.855,45.705) v1@55.147,44.997 ; 55.334,103.759 cw(c55.334,102.884) 55.953,103.503 ccw(c55.334,102.884) 55.334,103.759 ; 56.113,44.704 ccw(c56.113,45.962) 57.003,45.072 cw(c56.113,45.962) 56.113,44.704 ; v1@56.197,103.503 cw(c56.816,102.884) 56.816,103.759 ccw(c56.816,102.884) v1@56.197,103.503 ; 56.727,44.704 ccw(c56.727,45.348) 57.182,44.893 cw(c56.727,45.348) 56.727,44.704 ; U2.21@56.878,75.253 cw(c56.669,75.044) 56.964,75.044 ccw(c56.669,75.044) U2.21@56.878,75.253 ; U2.22@56.964,74.87 cw(c57.505,74.87) 57.122,75.253 ccw(c57.505,74.87) U2.22@56.964,74.87 ; v1@57.068,44.893 ccw(c57.523,45.348) 57.523,44.704 cw(c57.523,45.348) v1@57.068,44.893 ; U2.20@57.086,75.978 cw(c57.623,75.441) 57.623,76.2 ccw(c57.623,75.441) U2.20@57.086,75.978 ; 57.183,59.642 ccw(c58.293,60.751) 58.293,59.182 cw(c58.293,60.751) 57.183,59.642 ; 57.22,59.605 cw(c56.161,58.547) 57.658,58.547 ccw(c56.161,58.547) 57.22,59.605 ; v1@57.247,45.072 ccw(c58.137,45.962) 58.137,44.704 cw(c58.137,45.962) v1@57.247,45.072 ; 57.617,59.208 ccw(c58.293,59.884) 58.293,58.928 cw(c58.293,59.884) 57.617,59.208 ; 57.653,59.172 cw(c57.028,58.547) 57.912,58.547 ccw(c57.028,58.547) 57.653,59.172 ; 57.679,44.704 cw(c57.679,43.504) 58.528,44.353 ccw(c57.679,43.504) 57.679,44.704 ; U2.19@57.88,76.347 ccw(c58.236,76.703) 58.236,76.2 cw(c58.236,76.703) U2.19@57.88,76.347 ; 58.293,44.704 cw(c58.293,44.118) 58.707,44.532 ccw(c58.293,44.118) 58.293,44.704 ; 58.328,103.759 cw(c58.328,102.628) 59.128,103.428 ccw(c58.328,102.628) 58.328,103.759 ; 58.382,44.704 ccw(c58.382,46.218) 59.453,45.147 cw(c58.382,46.218) 58.382,44.704 ; v1@58.593,44.532 cw(c59.007,44.118) 59.007,44.704 ccw(c59.007,44.118) v1@58.593,44.532 ; v1@58.772,44.353 cw(c59.621,43.504) 59.621,44.704 ccw(c59.621,43.504) v1@58.772,44.353 ; Key_2.2@58.941,103.759 cw(c58.941,103.241) 59.307,103.607 ccw(c58.941,103.241) Key_2.2@58.941,103.759 ; 58.996,44.704 ccw(c58.996,45.604) 59.632,44.968 cw(c58.996,45.604) 58.996,44.704 ; Key_2.2@59.193,103.607 cw(c59.559,103.241) 59.559,103.759 ccw(c59.559,103.241) Key_2.2@59.193,103.607 ; Key_2.2@59.372,103.428 cw(c60.172,102.628) 60.172,103.759 ccw(c60.172,102.628) Key_2.2@59.372,103.428 ; v1@59.518,44.968 ccw(c60.154,45.604) 60.154,44.704 cw(c60.154,45.604) v1@59.518,44.968 ; v1@59.697,45.147 ccw(c60.768,46.218) 60.768,44.704 cw(c60.768,46.218) v1@59.697,45.147 ; 59.792,44.704 cw(c59.792,44.017) 60.278,44.503 ccw(c59.792,44.017) 59.792,44.704 ; v1@60.522,44.503 cw(c61.008,44.017) 61.008,44.704 ccw(c61.008,44.017) v1@60.522,44.503 ; 60.903,103.759 cw(c60.903,102.628) 61.703,103.428 ccw(c60.903,102.628) 60.903,103.759 ; 61.042,44.704 cw(c61.042,42.992) 62.253,44.203 ccw(c61.042,42.992) 61.042,44.704 ; 61.516,103.759 cw(c61.516,103.241) 61.882,103.607 ccw(c61.516,103.241) 61.516,103.759 ; 61.656,44.704 cw(c61.656,43.606) 62.432,44.382 ccw(c61.656,43.606) 61.656,44.704 ; v1@61.768,103.607 cw(c62.134,103.241) 62.134,103.759 ccw(c62.134,103.241) v1@61.768,103.607 ; v1@61.947,103.428 cw(c62.747,102.628) 62.747,103.759 ccw(c62.747,102.628) v1@61.947,103.428 ; 62.241,67.113 ccw(c62.546,67.113) 62.33,66.897 cw(c62.546,67.113) 62.241,67.113 ; v1@62.318,44.382 cw(c63.094,43.606) 63.094,44.704 ccw(c63.094,43.606) v1@62.318,44.382 ; v1@62.497,44.203 cw(c63.708,42.992) 63.708,44.704 ccw(c63.708,42.992) v1@62.497,44.203 ; U2.134@63.837,88.081 cw(c64.334,88.081) 63.983,88.433 ccw(c64.334,88.081) U2.134@63.837,88.081 ; Key_3.2@64.17,103.759 cw(c64.17,101.945) 65.453,103.228 ccw(c64.17,101.945) Key_3.2@64.17,103.759 ; 64.783,103.759 cw(c64.783,102.558) 65.632,103.407 ccw(c64.783,102.558) 64.783,103.759 ; v1@65.496,103.368 cw(c65.984,103.26) 65.984,103.759 ccw(c65.984,103.26) v1@65.496,103.368 ; 66.294,52.875 ccw(c67.1,52.875) 66.53,52.305 cw(c67.1,52.875) 66.294,52.875 ; 66.294,53.488 ccw(c67.713,53.488) 66.71,52.485 cw(c67.713,53.488) 66.294,53.488 ; 66.821,103.759 ccw(c66.821,104.829) 67.578,104.072 cw(c66.821,104.829) 66.821,103.759 ; 67.434,103.759 ccw(c67.434,104.216) 67.757,103.893 cw(c67.434,104.216) 67.434,103.759 ; v1@67.643,103.893 ccw(c67.966,104.216) 67.966,103.759 cw(c67.966,104.216) v1@67.643,103.893 ; v1@67.822,104.072 ccw(c68.579,104.829) Key_4.2@68.58,103.759 cw(c68.579,104.829) v1@67.822,104.072 ; Key_4.2@68.587,104.14 ccw(c68.629,104.936) 69.193,104.372 cw(c68.629,104.936) Key_4.2@68.587,104.14 ; Key_4.2@68.961,104.013 cw(c69.268,104.013) 69.051,104.23 ccw(c69.268,104.013) Key_4.2@68.961,104.013 ; v1@69.325,54.572 ccw(c68.539,55.358) 69.65,55.358 cw(c68.539,55.358) v1@69.325,54.572 ; v1@69.504,54.393 ccw(c69.152,54.745) 69.65,54.745 cw(c69.152,54.745) v1@69.504,54.393 ; 70.58,41.815 ccw(c71.225,42.461) 71.225,41.548 cw(c71.225,42.461) 70.58,41.815 ; v1@71.168,41.318 ccw(c71.814,41.964) 71.814,41.05 cw(c71.814,41.964) v1@71.168,41.318 ; v1@71.347,41.497 ccw(c72.427,42.577) 72.427,41.05 cw(c72.427,42.577) v1@71.347,41.497 ; 73.143,41.05 ccw(c73.143,42.407) 74.103,41.447 cw(c73.143,42.407) 73.143,41.05 ; 73.757,41.05 ccw(c73.757,41.793) 74.282,41.268 cw(c73.757,41.793) 73.757,41.05 ; v1@74.168,41.268 ccw(c74.693,41.793) 74.693,41.05 cw(c74.693,41.793) v1@74.168,41.268 ; v1@74.347,41.447 ccw(c75.307,42.407) 75.307,41.05 cw(c75.307,42.407) v1@74.347,41.447 ; 75.342,41.05 ccw(c75.342,42.833) 76.603,41.572 cw(c75.342,42.833) 75.342,41.05 ; 75.578,73.934 ccw(c76.404,73.934) 75.82,73.35 cw(c76.404,73.934) 75.578,73.934 ; v2@75.69,63.71 ccw(c75.392,64.008) 75.814,64.008 cw(c75.392,64.008) v2@75.69,63.71 ; 75.814,64.061 ccw(c76.311,64.061) 75.96,63.71 cw(c76.311,64.061) 75.814,64.061 ; 75.955,41.05 ccw(c75.955,42.22) 76.782,41.393 cw(c75.955,42.22) 75.955,41.05 ; v1@76.668,41.393 ccw(c77.495,42.22) 77.495,41.05 cw(c77.495,42.22) v1@76.668,41.393 ; v1@76.847,41.572 ccw(c78.108,42.833) 78.108,41.05 cw(c78.108,42.833) v1@76.847,41.572 ; 76.892,77.654 cw(c77.264,77.282) 77.264,77.808 ccw(c77.264,77.282) 76.892,77.654 ; 78.268,41.05 ccw(c78.268,42.407) 79.228,41.447 cw(c78.268,42.407) 78.268,41.05 ; 78.882,41.05 ccw(c78.882,41.793) 79.407,41.268 cw(c78.882,41.793) 78.882,41.05 ; v1@79.293,41.268 ccw(c79.818,41.793) 79.818,41.05 cw(c79.818,41.793) v1@79.293,41.268 ; v1@79.472,41.447 ccw(c80.432,42.407) 80.432,41.05 cw(c80.432,42.407) v1@79.472,41.447 ; 79.834,77.959 ccw(c79.518,78.268) 79.96,78.273 cw(c79.518,78.268) 79.834,77.959 ; 79.834,77.959 cw(c80.143,77.643) 80.148,78.085 ccw(c80.143,77.643) 79.834,77.959 ; 80.517,41.05 ccw(c80.517,42.833) 81.778,41.572 cw(c80.517,42.833) 80.517,41.05 ; 81.13,41.05 ccw(c81.13,42.22) 81.957,41.393 cw(c81.13,42.22) 81.13,41.05 ; 81.621,62.571 cw(c82.536,62.571) 81.889,63.218 ccw(c82.536,62.571) 81.621,62.571 ; v1@81.843,41.393 ccw(c82.67,42.22) 82.67,41.05 cw(c82.67,42.22) v1@81.843,41.393 ; v1@82.022,41.572 ccw(c83.283,42.833) 83.283,41.05 cw(c83.283,42.833) v1@82.022,41.572 ; 83.798,41.05 ccw(c83.798,42.577) 84.878,41.497 cw(c83.798,42.577) 83.798,41.05 ; 84.411,41.05 ccw(c84.411,41.964) 85.057,41.318 cw(c84.411,41.964) 84.411,41.05 ; v1@84.943,41.318 ccw(c85.589,41.964) 85.589,41.05 cw(c85.589,41.964) v1@84.943,41.318 ; 85.034,76.541 ccw(c85.343,76.857) 85.348,76.415 cw(c85.343,76.857) 85.034,76.541 ; v1@85.122,41.497 ccw(c86.202,42.577) 86.202,41.05 cw(c86.202,42.577) v1@85.122,41.497 ; v1@85.478,96.628 cw(c84.941,96.091) 85.7,96.091 ccw(c84.941,96.091) v1@85.478,96.628 ; v1@85.478,96.872 ccw(c84.941,97.409) 85.7,97.409 cw(c84.941,97.409) v1@85.478,96.872 ; 86.066,104.409 cw(c85.04,103.382) 86.48,103.199 ccw(c85.04,103.382) 86.066,104.409 ; 86.377,104.098 ccw(c86.945,104.667) 86.945,103.863 cw(c86.945,104.667) 86.377,104.098 ; 86.432,104.043 cw(c85.69,103.3) 86.732,103.167 ccw(c85.69,103.3) 86.432,104.043 ; 88.212,41.05 ccw(c88.212,41.638) 88.628,41.222 cw(c88.212,41.638) 88.212,41.05 ; 88.453,41.05 cw(c88.453,40.803) 88.628,40.978 ccw(c88.453,40.803) 88.453,41.05 ; v1@88.872,40.978 cw(c89.047,40.803) 89.047,41.05 ccw(c89.047,40.803) v1@88.872,40.978 ; v1@88.872,41.222 ccw(c89.288,41.638) 89.288,41.05 cw(c89.288,41.638) v1@88.872,41.222 ; 91.06,41.05 ccw(c91.06,42.065) 91.778,41.347 cw(c91.06,42.065) 91.06,41.05 ; v1@92.022,41.347 ccw(c92.74,42.065) 92.74,41.05 cw(c92.74,42.065) v1@92.022,41.347
  Top Layer w0.381: D6.2@82.089,55.515 ccw(c81.634,56.304) D6.2@82.514,56.068 ; D6.2@82.134,55.635 ccw(c81.776,56.754) 82.911,56.45 ; v7(82.169,55.377) 82.169,55.694 83.475,57 83.475,58.975 83.025,59.425 82.175,59.425 81.932,59.668 81.932,60.539 82.587,61.194 ; D6.2@82.328,55.36 cw(c83.224,55.264) D6.2@82.736,56.022 ; D6.2@82.169,56.021 ccw(c82.169,56.812) 82.728,56.253 cw(c82.169,56.812) D6.2@82.169,56.021 ; D6.2@82.328,55.377 cw(c83.479,55.377) 82.665,56.19 ccw(c83.479,55.377) D6.2@82.328,55.377 ; D6.2@82.663,55.527 cw(c84.261,55.527) 83.131,56.656 ccw(c84.261,55.527) D6.2@82.663,55.527
  Top Layer w0.508: 82.681,61.1 88.887,61.1 ; 86.362,87.187 98.35,75.2 v2(98.925,75.2) ; 88.98,60.863 ccw(c89.748,61.136) ManD1.2@89.662,60.325 ; 89.124,61.007 cw(c88.851,60.239) ManD1.2@89.662,60.325 ; ManD1.2@89.155,60.364 ccw(c88.209,60.436) 88.887,61.1 ; ManD1.2@89.157,60.377 ccw(c88.29,60.465) 88.9,61.087 ; ManD1.2@89.61,60.83 cw(c89.522,61.697) 88.9,61.087 ; ManD1.2@89.623,60.832 cw(c89.551,61.778) 88.887,61.1 ; v3(91.5,61.4) 91.675,61.575 99.588,61.575 100.263,60.9 v5(102.175,60.9) ; 88.887,61.1 ccw(c89.536,61.737) 89.617,60.831 cw(c89.536,61.736) 88.9,61.087 ; 88.887,61.1 cw(c88.25,60.451) 89.156,60.37 ccw(c88.251,60.451) 88.9,61.087 ; 88.887,61.1 cw(c88.231,60.444) 89.156,60.367 ccw(c88.231,60.444) 88.887,61.1 ; 88.887,61.1 ccw(c89.543,61.756) 89.62,60.831 cw(c89.543,61.756) 88.887,61.1 ; 88.887,61.1 ManD1.2@89.662,60.325 ; v3@91.533,61.367 cw(c92.034,60.866) 92.034,61.575 ccw(c92.034,60.866) v3@91.533,61.367 ; 96.658,76.892 cw(c96.366,76.6) 96.779,76.6 ccw(c96.366,76.6) 96.658,76.892 ; v1@96.825,76.554 cw(c96.825,76.141) 97.117,76.433 ccw(c96.825,76.141) v1@96.825,76.554